# Altium PCB CanSat Communitcation.PcbDoc
Units mil, origin at the board's own origin, x right, y up, seen from the top; angles counter-clockwise.
Board outline 1968.5 x 1968.5 mil, 4 copper layers (Top Layer, Ground, Power, Bottom Layer), stack 64.6 mil thick; 33 components, 45 nets, 221 pads, 64 vias.
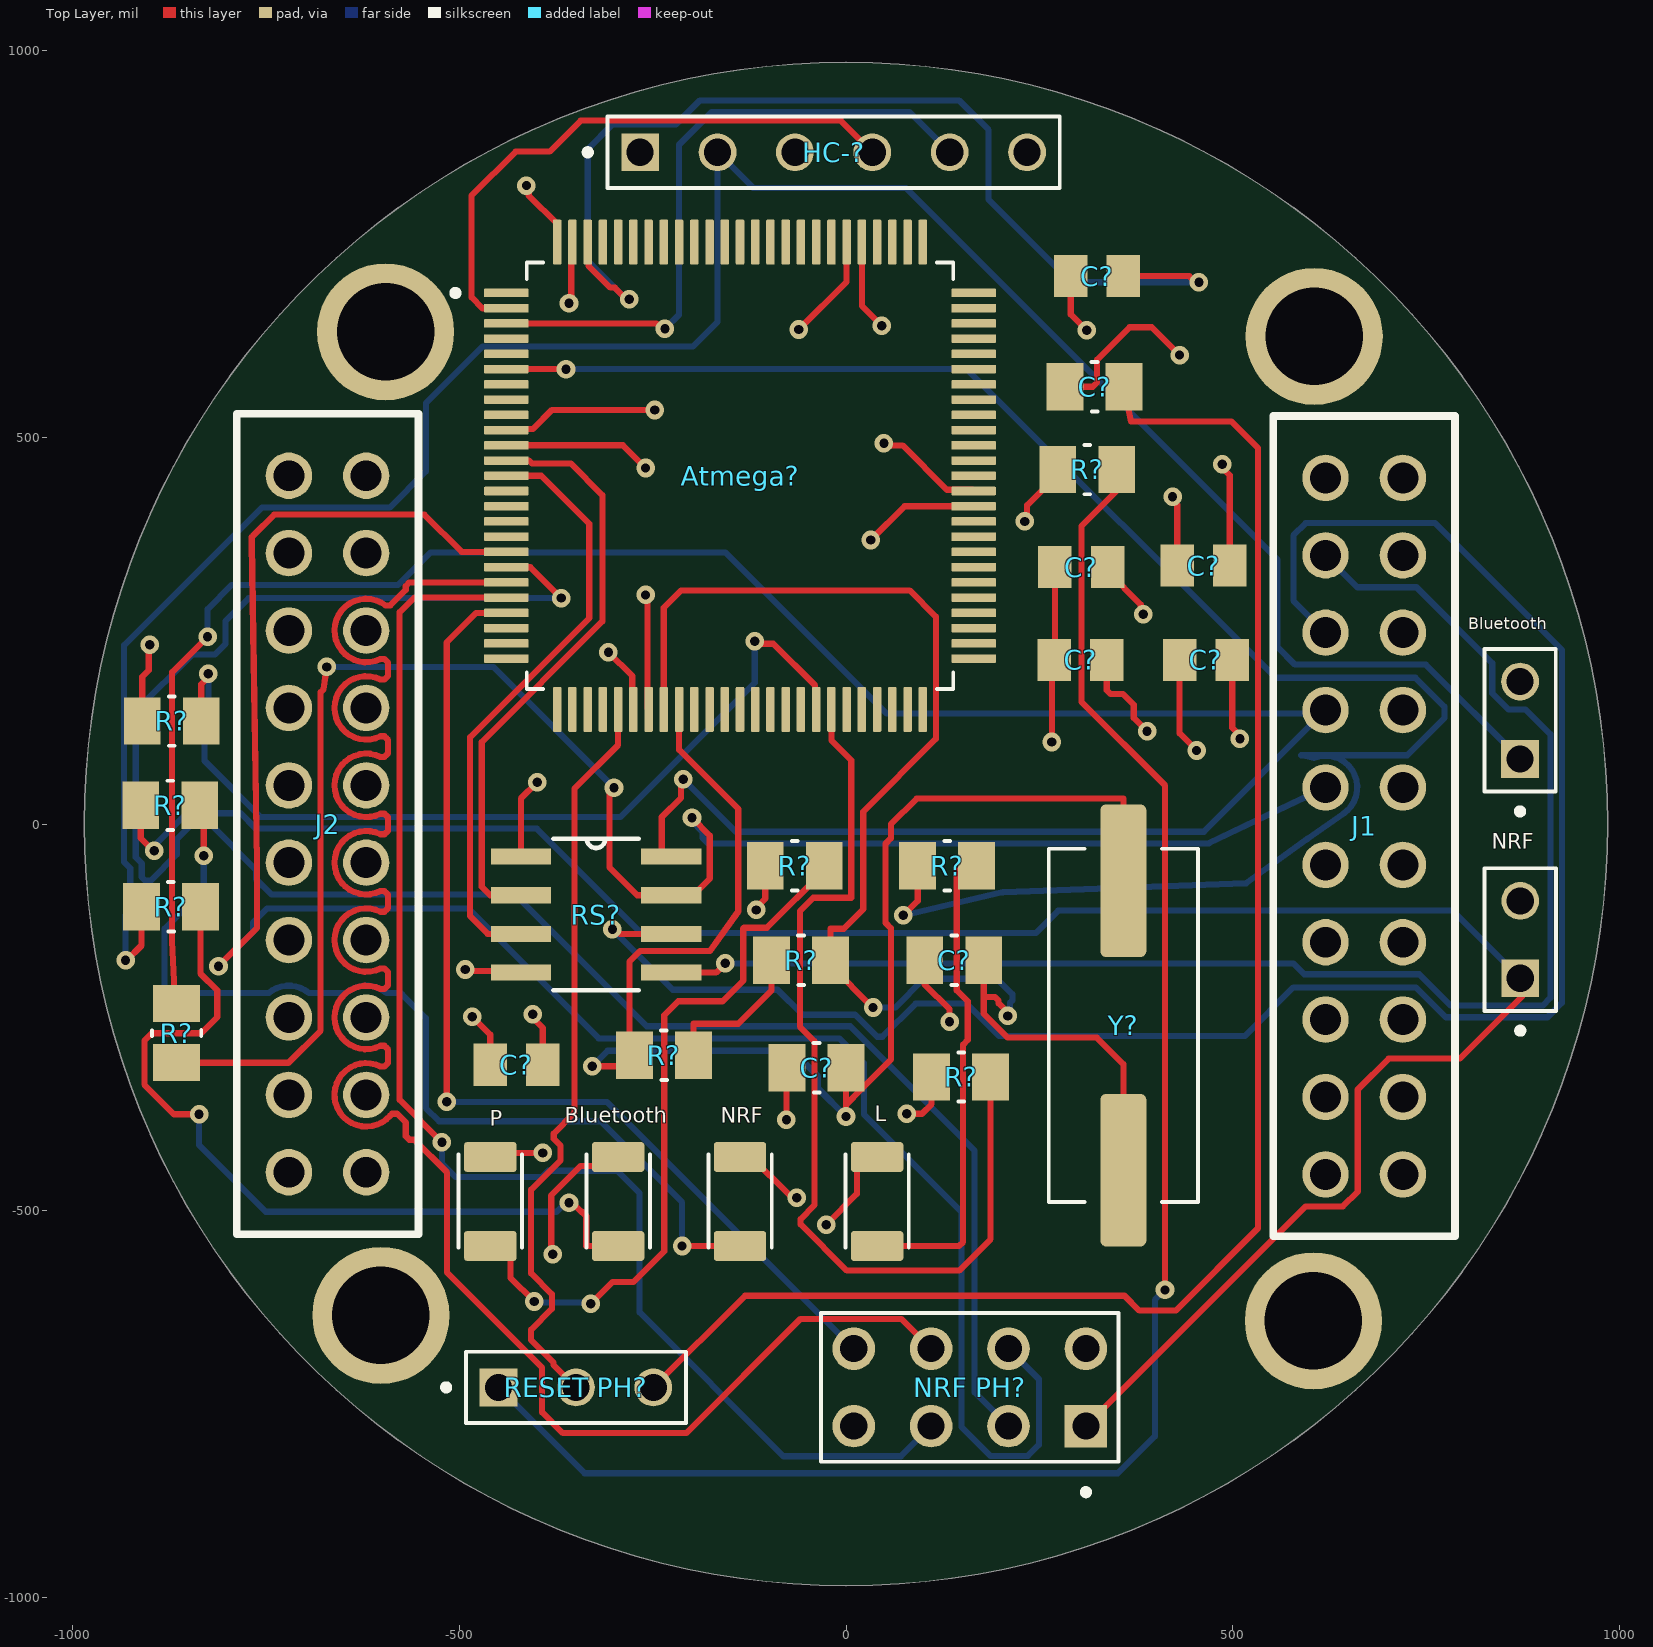
[diagram p0: Top Layer view]
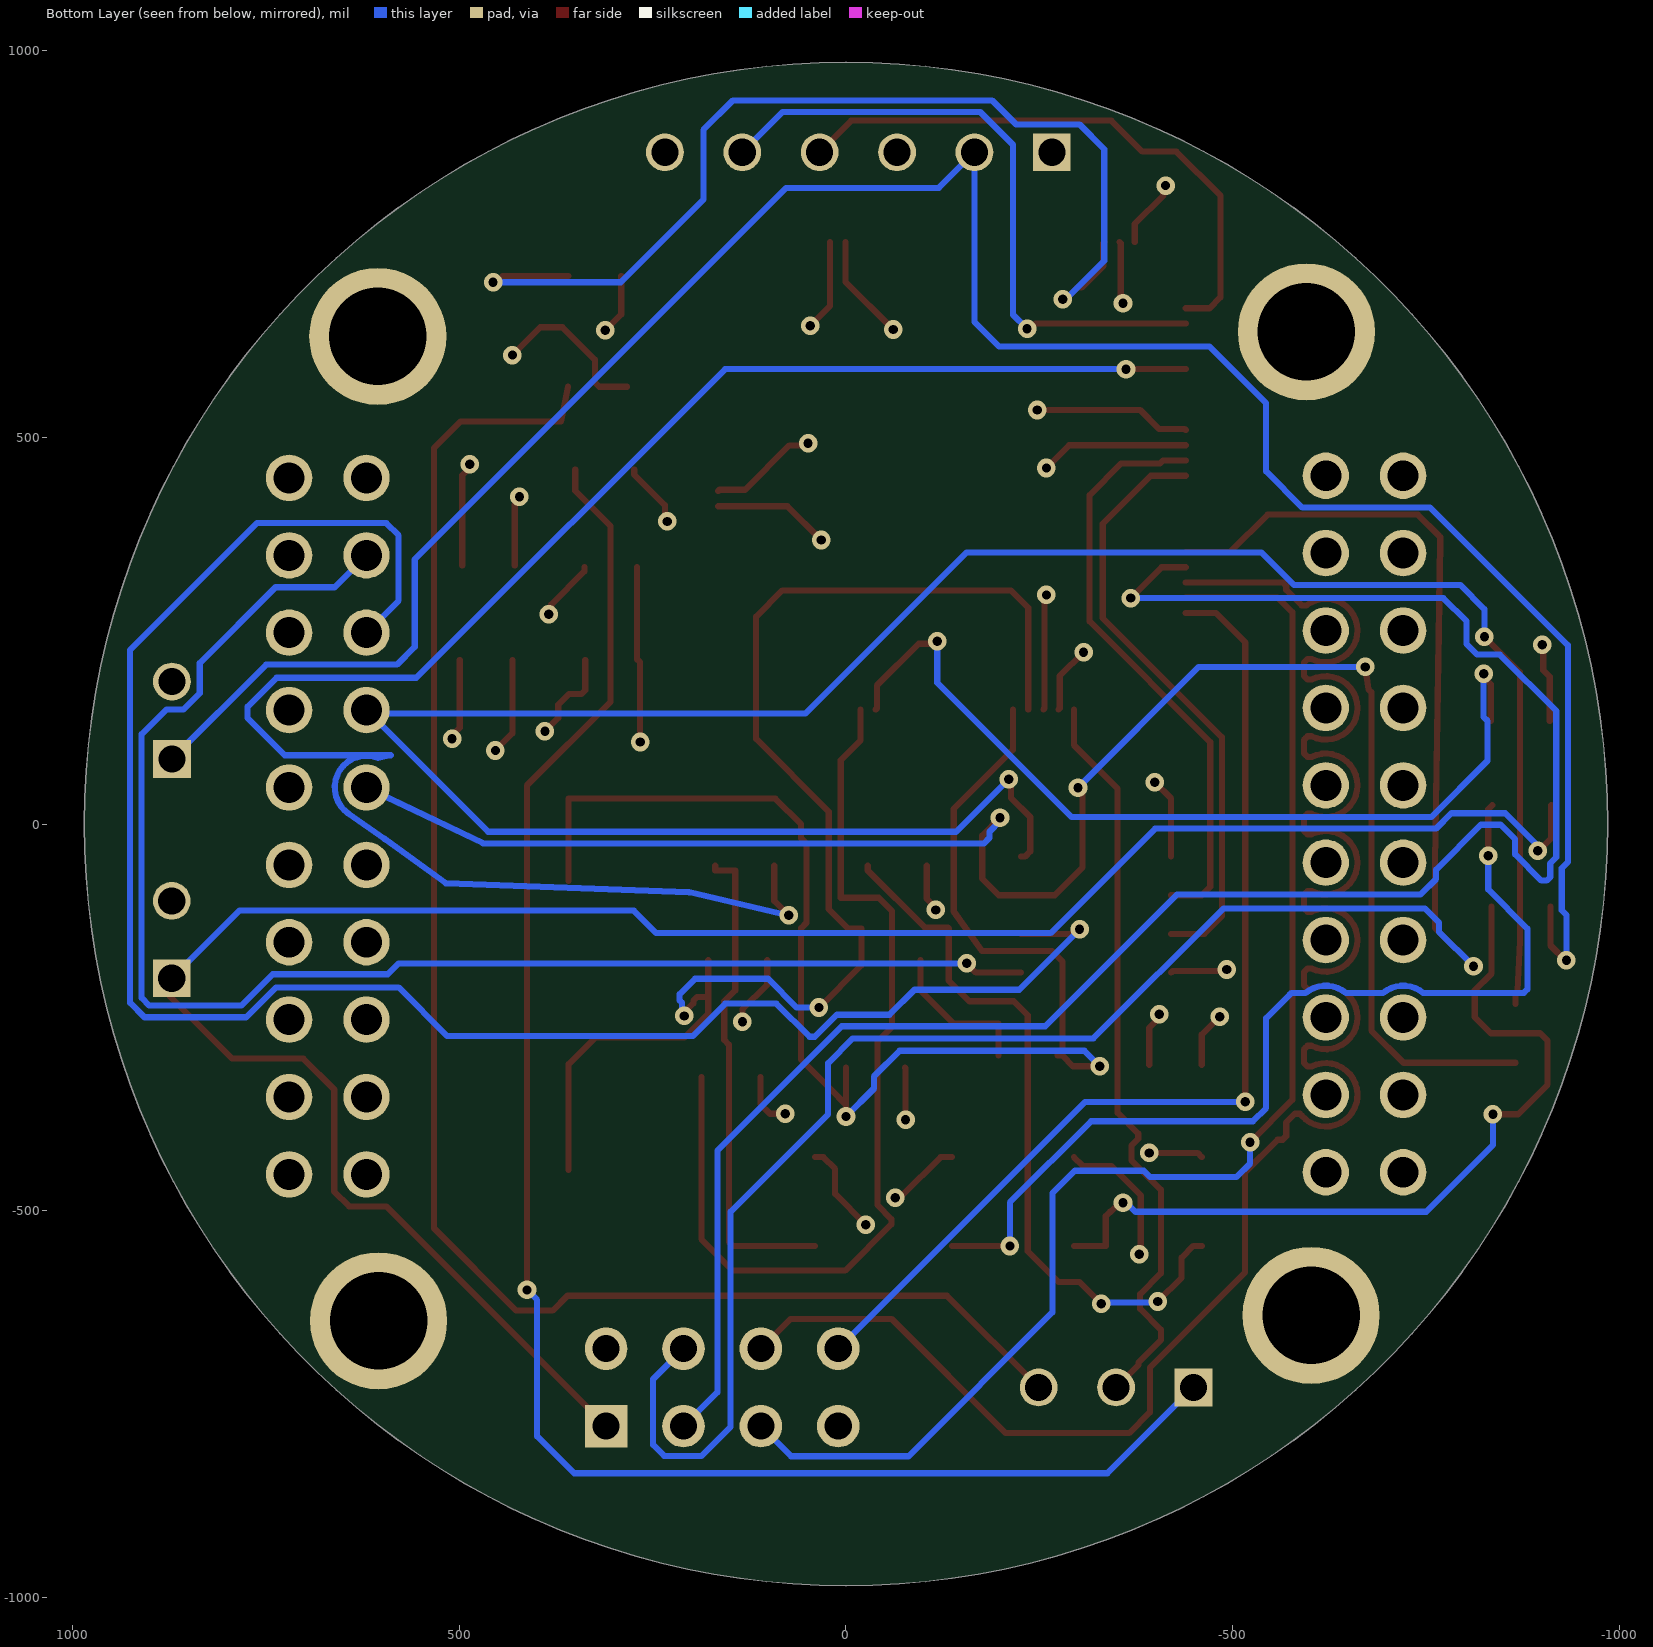
[diagram p1: Bottom Layer view, seen from below]
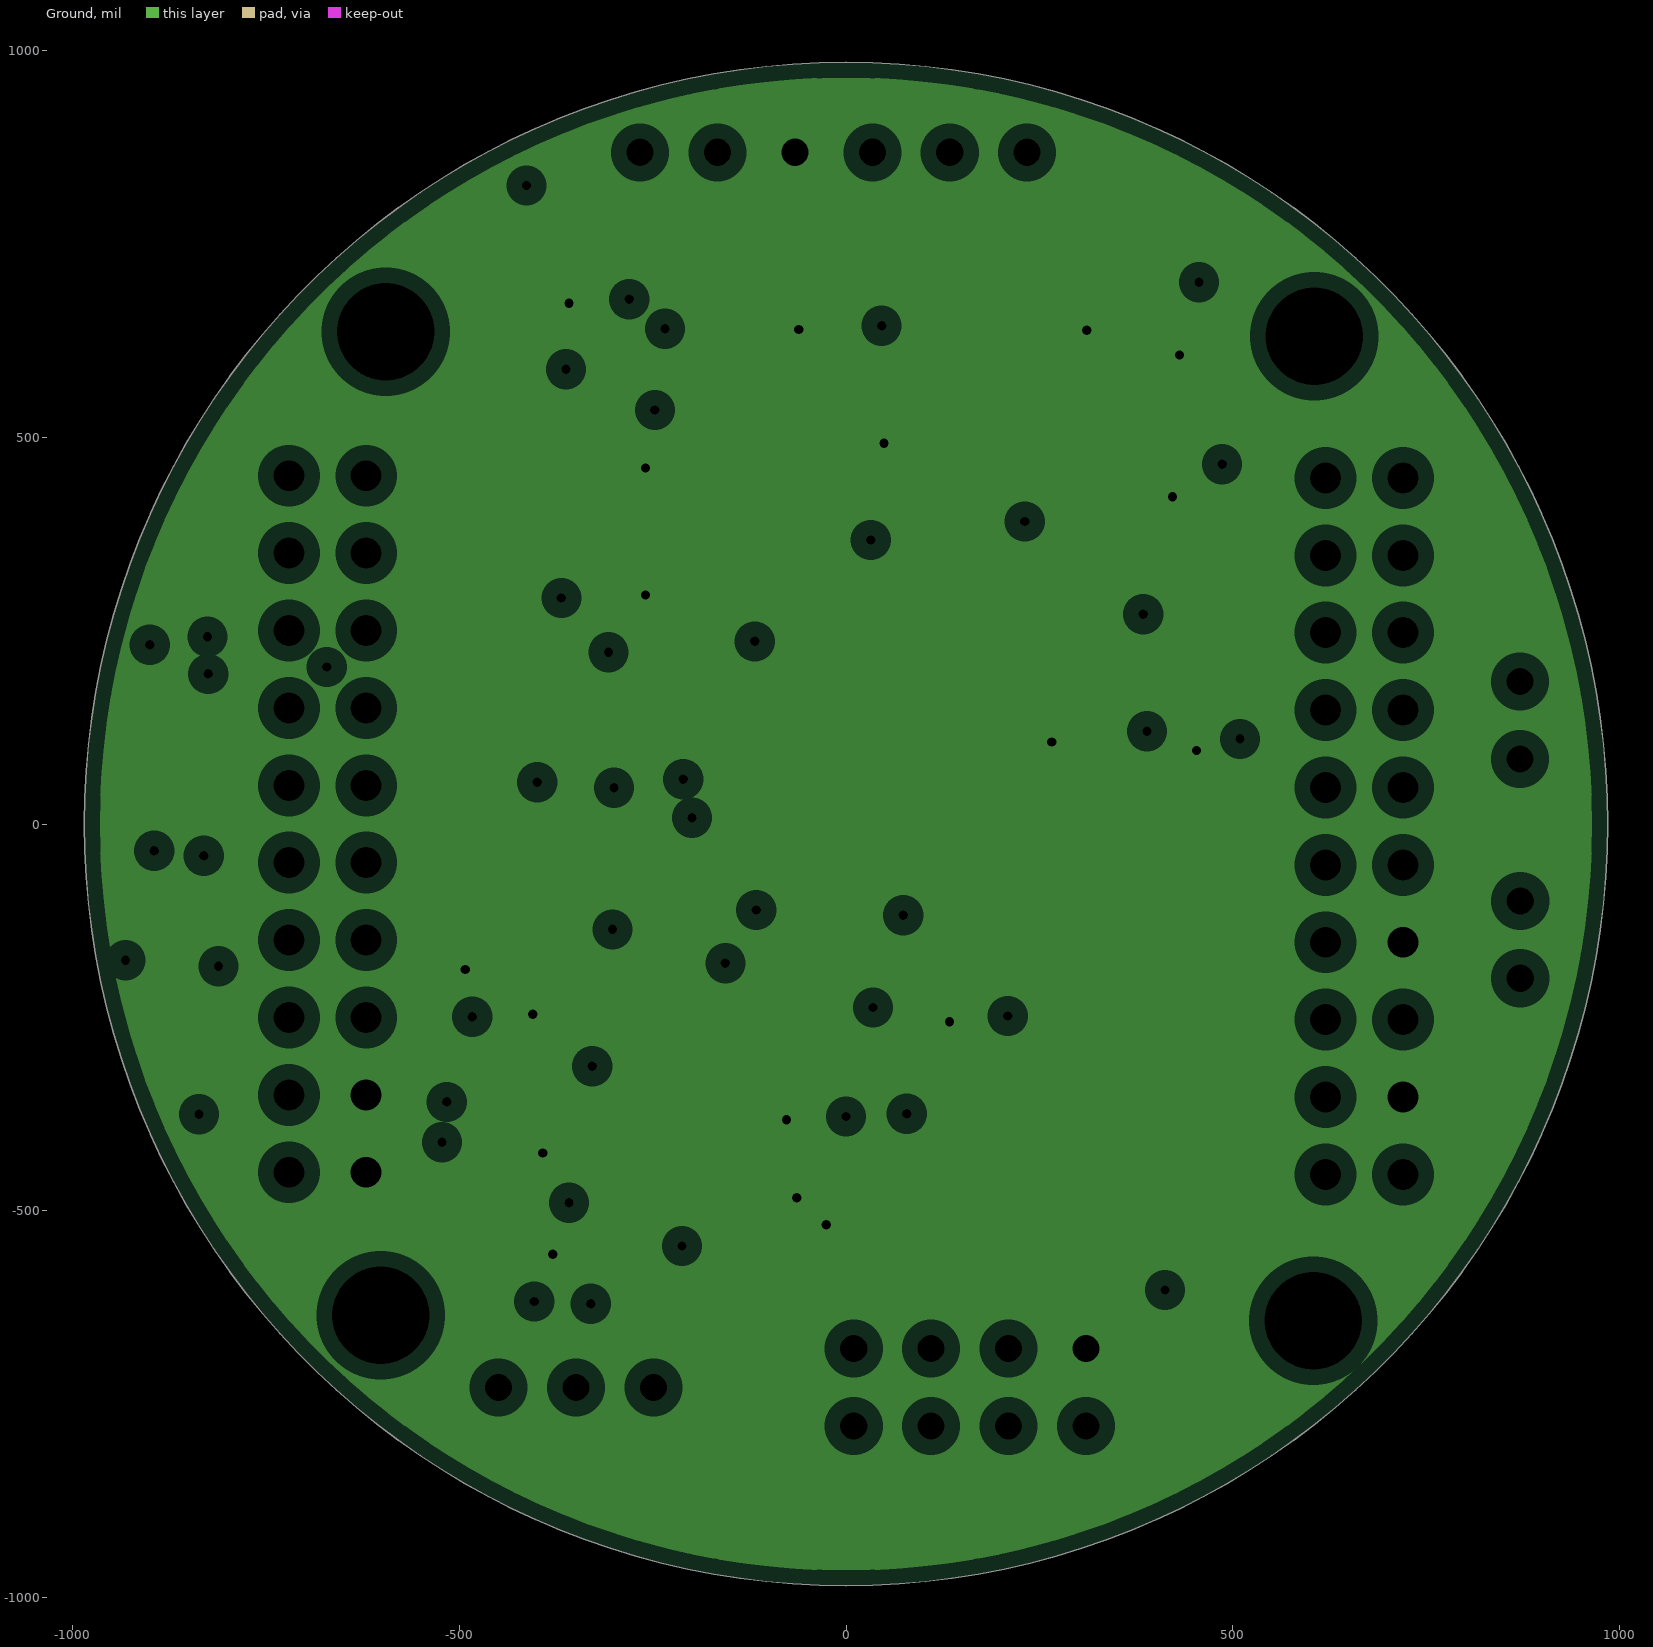
[diagram p2: Ground, clearances drawn from the general rule]
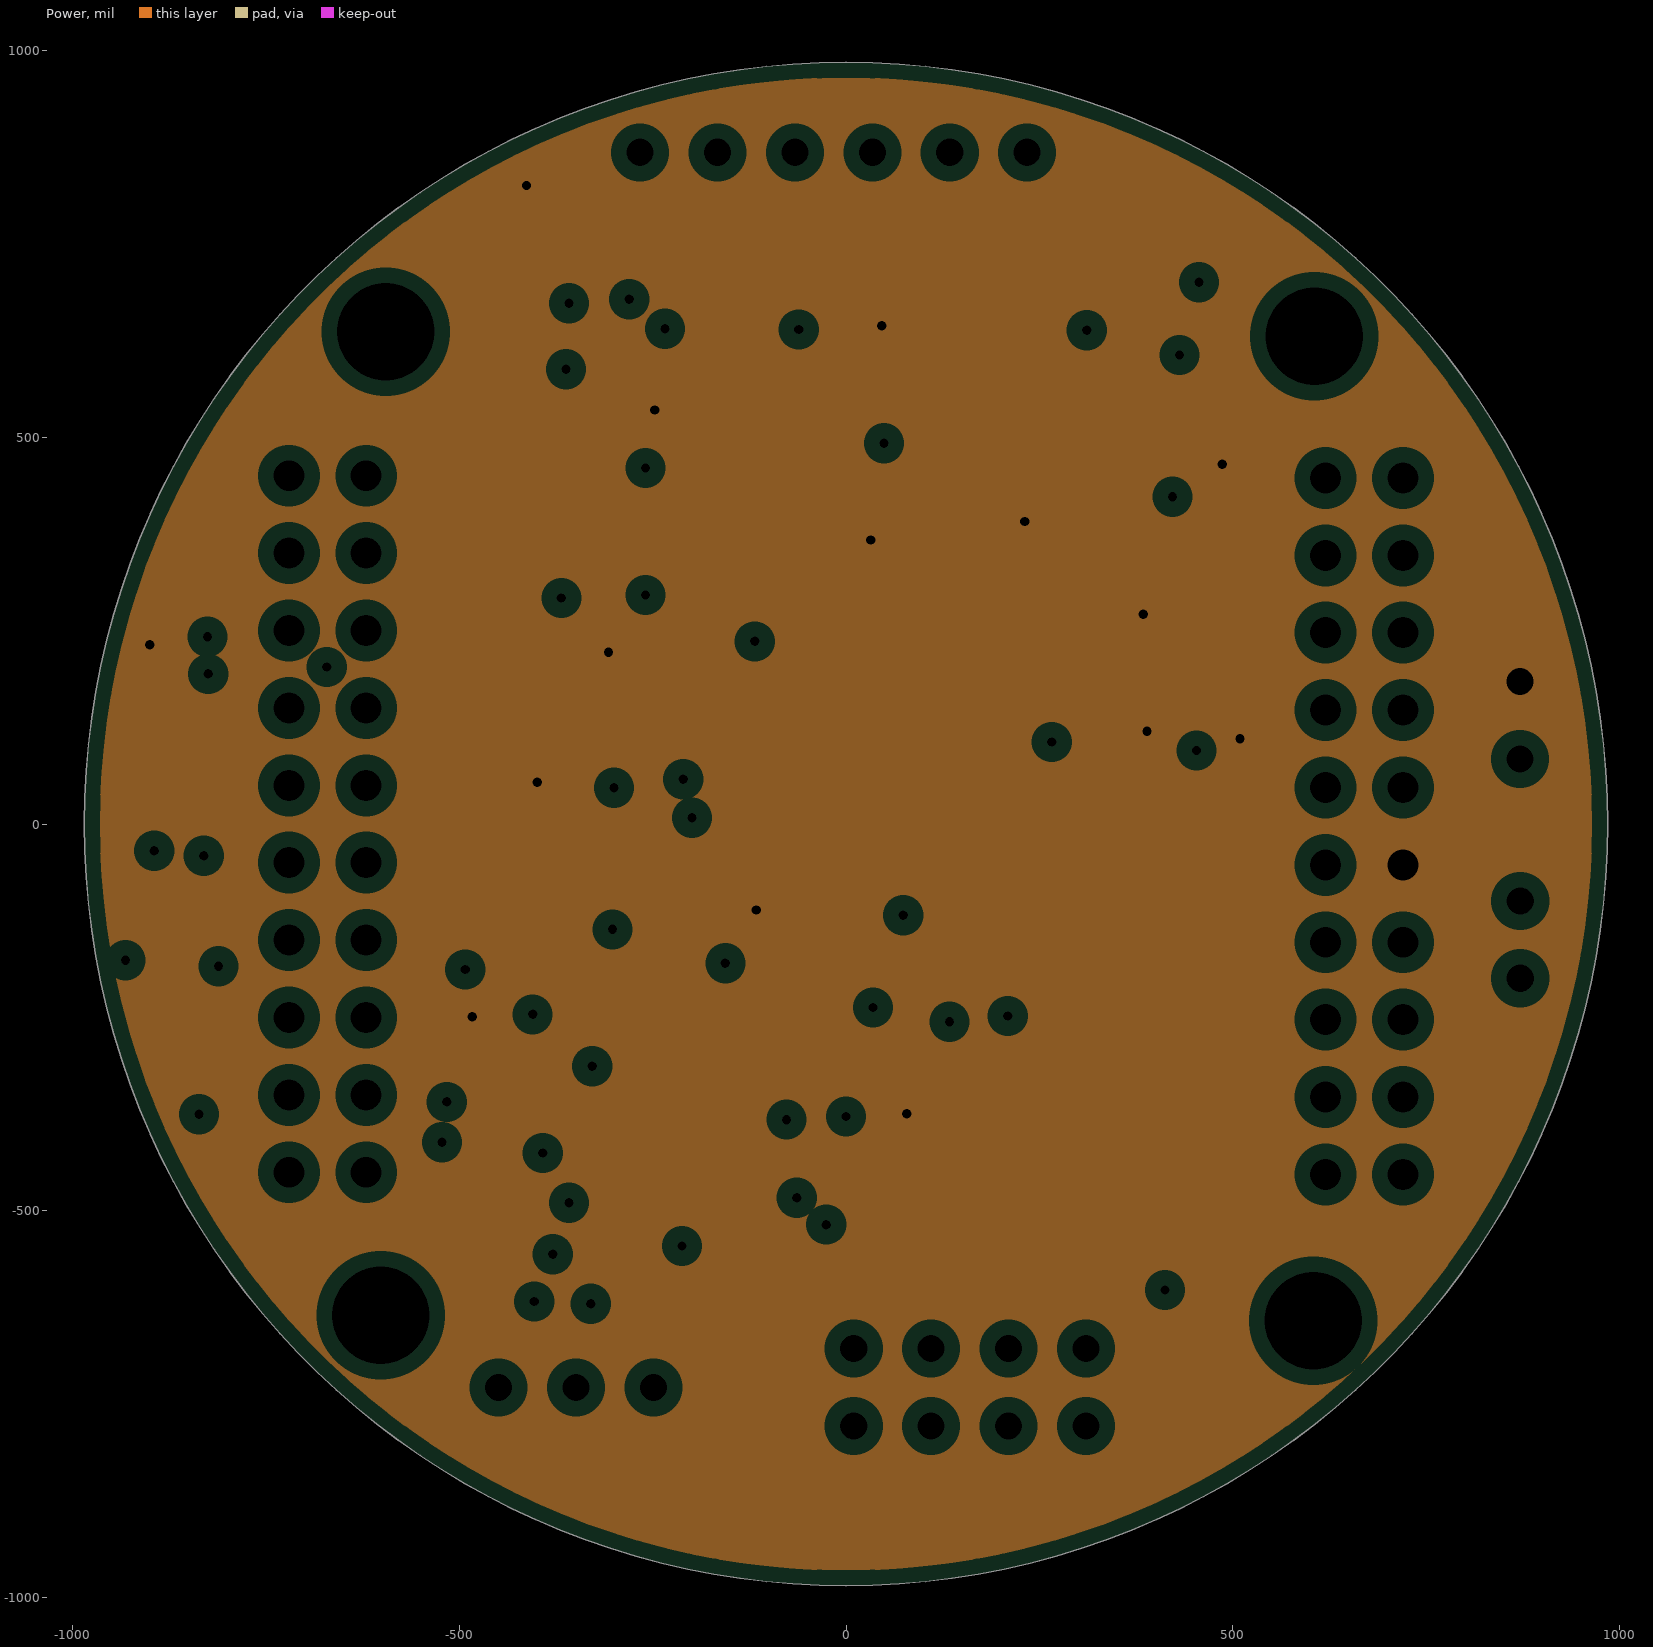
[diagram p3: Power, clearances drawn from the general rule]
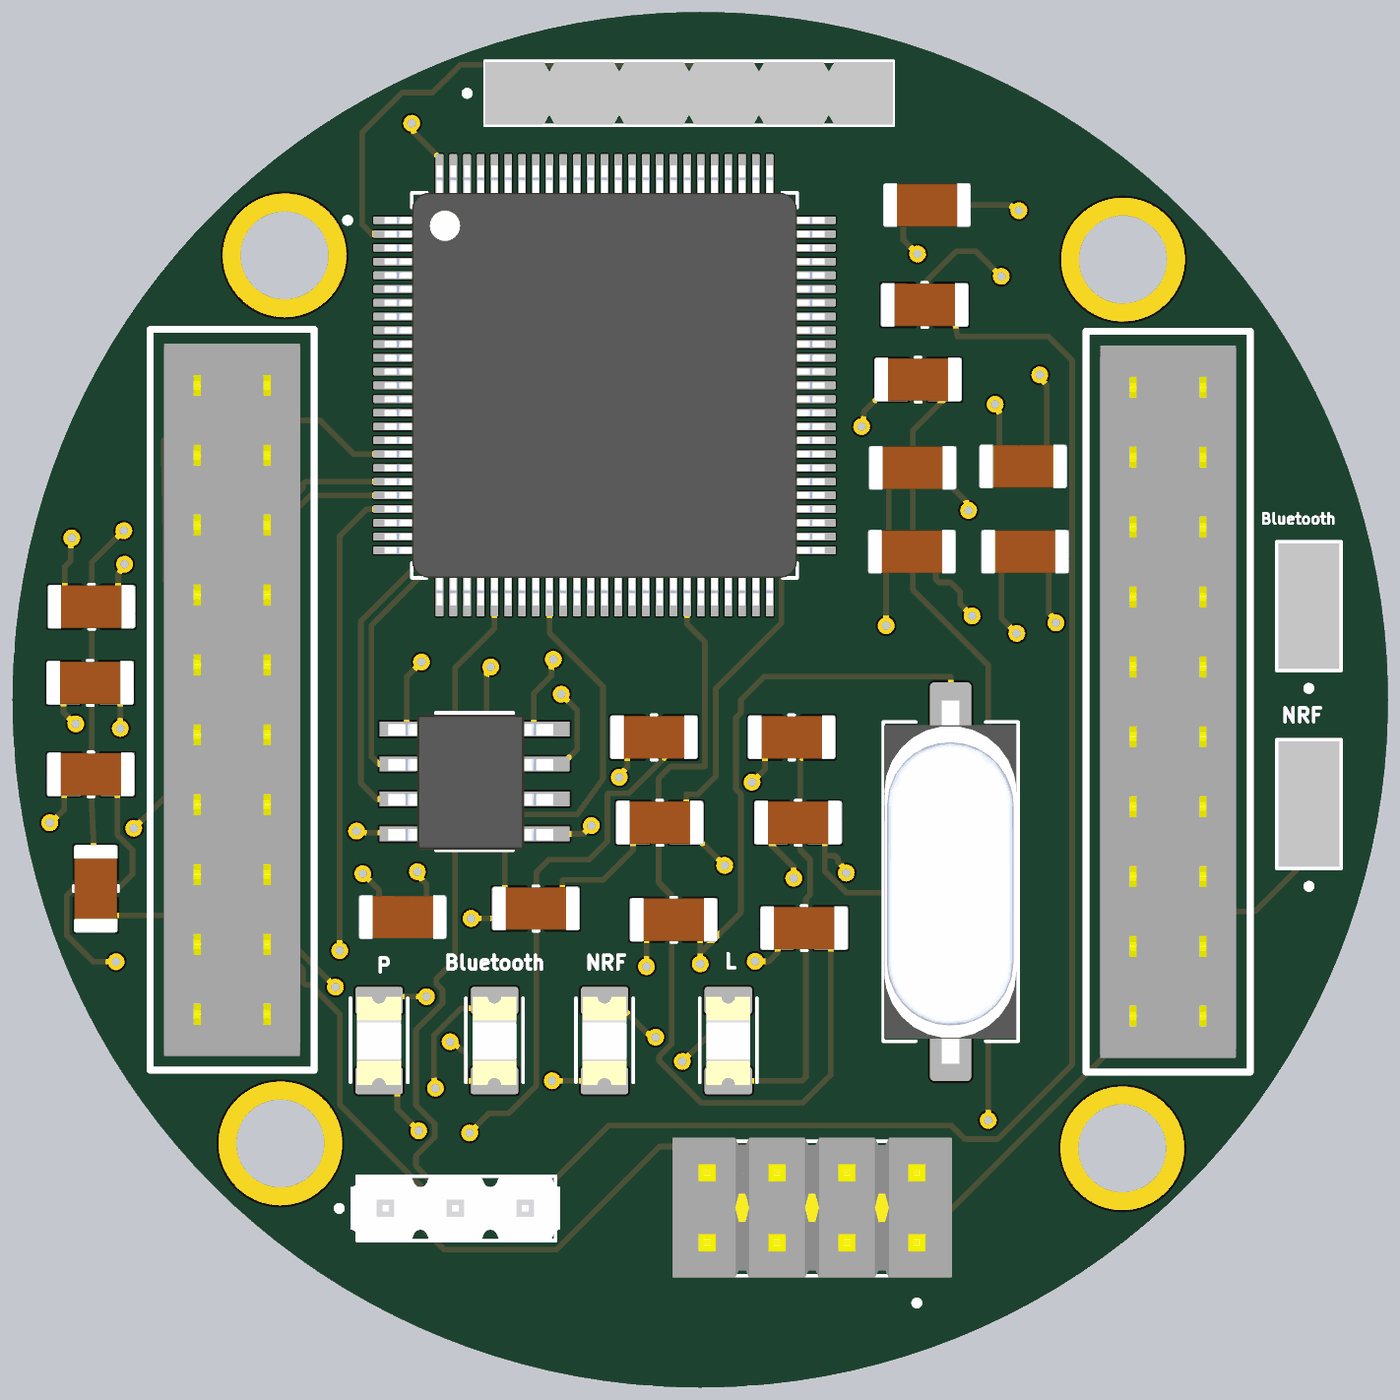
[diagram p4: 3D render of the assembled board from above, using the file's embedded part models]

## Layer stack, top to bottom
Top Solder: solder mask 0.4, Solder Resist, Dk 3.5
Top Layer: signal copper 1.4
Dielectric 1: prepreg 6.7, FR-4, Dk 4.35
Ground: plane copper 0.7, net G
Dielectric 3: core 47, FR-4, Dk 4.35
Power: plane copper 0.7, net VCC-5V(COMM)
Dielectric 2: prepreg 6.7, FR-4, Dk 4.35
Bottom Layer: signal copper 1.4
Bottom Solder: solder mask 0.4, Solder Resist, Dk 3.5

## Board outline
-0.03,-984.24 cw(c-0.03,0) -984.28,0 cw(c-0.03,0) -0.03,984.25 cw(c-0.03,0) 984.22,0 cw(c-0.03,0)

## Design rules (kind name [scope] priority, off if disabled: settings)
Clearance [All] p1: gap=7 ignorepadtopadclearanceinfootprint=FALSE except(0: Arc-Hole Track-Hole SMDPad-Hole THPad-Hole Via-Hole Fill-Hole Poly-Hole Region-Hole Text-Hole)
ComponentClearance [All] p1: gap=30 collisioncheckmode=3 verticalgap=30 showdistances=FALSE
DiffPairsRouting [All] p1: maxlimit=10 minlimit=10 mostfreqgap=10 toplayer_minwidth=15 toplayer_maxwidth=15 toplayer_prefwidth=15 bottomlayer_minwidth=15 bottomlayer_maxwidth=15 bottomlayer_prefwidth=15 substack1={0761D619-B0FF-4D42-81BD-1B94FE1A46B2} toplayer_{0761d619-b0ff-4d42-81bd-1b94fe1a46b2}_minwidth=15 toplayer_{0761d619-b0ff-4d42-81bd-1b94fe1a46b2}_maxwidth=15 toplayer_{0761d619-b0ff-4d42-81bd-1b94fe1a46b2}_prefwidth=15 bottomlayer_{0761d619-b0ff-4d42-81bd-1b94fe1a46b2}_minwidth=15 bottomlayer_{0761d619-b0ff-4d42-81bd-1b94fe1a46b2}_maxwidth=15 bottomlayer_{0761d619-b0ff-4d42-81bd-1b94fe1a46b2}_prefwidth=15 maxuncoupledlength=500
HoleSize [All] p1: absolutevalues=TRUE maxlimit=130 minlimit=1 maxpercent=80.000 minpercent=20.000
HoleToHoleClearance [All] p1: gap=6 allowstackedmicrovias=TRUE
MinimumSolderMaskSliver [All] p1: minsoldermaskwidth=3
PlaneClearance [All] p1: clearance=20
PlaneConnect [All] p1: planeconnectstyle=Relief reliefexpansion=20 reliefentries=4 reliefconductorwidth=10 reliefairgap=10
PolygonConnect [All] p1: connectstyle=Relief reliefconductorwidth=10 reliefentries=4 polygonreliefangle="90 Angle" airgapwidth=10
RoutingVias [All] p1: holewidth=12 width=24 viastyle="Through Hole" minholewidth=10 minwidth=10 maxholewidth=12 maxwidth=24
SilkToSilkClearance [All] p1: silktosilkclearance=4
SilkToSolderMaskClearance [IsPad] p1: minsilkscreentomaskgap=4 clearancetoexposedcopper=TRUE
SolderMaskExpansion [All] p1: expansion=3 istentingtop=FALSE
Width [All] p1: maxlimit=40 minlimit=7 preferedwidth=8 substack1={0761D619-B0FF-4D42-81BD-1B94FE1A46B2} toplayer_{0761d619-b0ff-4d42-81bd-1b94fe1a46b2}_prefwidth=12 bottomlayer_{0761d619-b0ff-4d42-81bd-1b94fe1a46b2}_prefwidth=12 minimp=50.000000 maximp=50.000000 favimp=50.000000
21 further rules are at their usual default settings.

## Classes and differential pairs
component class "CanSat Communication": Atmega? C? HC-? J1 J2 L NRF "NRF PH?" P R? "RESET PH?" RS? Y?

## Components (designator, comment, footprint, x,y, rotation, side; value= is the part's Value field where it differs from the comment)
Atmega? "" QFP50P1600X1600X120-100N -137,450 r0 top
Bluetooth "2 Position PinHeader" TE_2-103327-2 871.71,132.29 r90 top (schematic designator "Bluetooth POWER?")
Bluetooth "(1206) GREEN" RESC3015X65-01 -294.62,-487.07 r90 top (schematic designator "Bluetooth  LED?")
C? "(0805) 100nF" CAPC2012X95N-0 462,334 r0 top
C? "(0805) 100nF" CAPC2012X95N-0 303,212 r0 top
C? "(1206) 22pF" CAPC3216X125N0 -38.82,-313.07 r0 top
C? "(0805) 100nF" CAPC2012X95N-0 -425.82,-311.07 r0 top
C? "(1206) 22pF" CAPC3216X125N0 320.41,566.87 r0 top
C? "(0805) 100nF" CAPC2012X95N-0 324.45,708 r0 top
C? "(1206) 22pF" CAPC3216X125N0 139.18,-174.07 r0 top
C? "(0805) 100nF" CAPC2012X95N-0 304,332 r0 top
C? "(0805) 100nF" CAPC2012X95N-0 465,212 r0 top
HC-? "6 Position PinHeader 1Row" TE_6-146285-6 -266,868 r0 top
J1 "20 Position Elevated Socket Connector" ESQ-110-XX-X-D 669.61,-2.79 r90 top locked
J2 "20 Position Elevated Socket Connector" ESQ-110-XX-X-D -670,0 r90 top locked
L "(1206) Yellow" RESC3015X65-01 40.03,-487.07 r90 top (schematic designator LED?)
NRF "(1206) YELLOW" RESC3015X65-01 -137.14,-487.07 r90 top (schematic designator "NRF LED?")
NRF "2 Position PinHeader" TE_2-103327-2 872,-151 r90 top (schematic designator "NRE POWER?")
"NRF PH?" "8 Position PinHeader 2Row" TE_8-146256-8 160,-728 r180 top
P "BLUE-LED" RESC3015X65-01 -459.82,-487.07 r90 top (schematic designator ?)
R? "(1206) 150" CAPC3216X125N0 -873,-105 r0 top
R? "(1206) 10K" CAPC3216X125N0 311,460 r0 top
R? "(1206) 510K" CAPC3216X125N0 -236,-297 r0 top
R? "(1206)" CAPC3216X125N0 148,-325 r0 top
R? "(1206) 150" CAPC3216X125N0 130,-52 r0 top
R? "(1206) 120" CAPC3216X125N0 -867,-271 r90 top
R? "(1206) 150" CAPC3216X125N0 -67,-52 r0 top
R? "(1206) 510K" CAPC3216X125N0 -58.82,-174.07 r0 top
R? "(1206)" CAPC3216X125N0 -872,135 r0 top
R? "(1206) 65" CAPC3216X125N0 -874,26 r0 top
"RESET PH?" "3 Position PinHeader 1Row" TE_3-103327-3 -449,-728 r0 top
RS? "MAX488ESA+" SOIC127P600X175-8N0 -323,-117 r0 top
Y? "16MHZ" XTAL1140X490X430N-0 360,-260 r90 top

## Footprints (in the part's own frame and the unit in brackets; to place one, negate y for a bottom-side part, rotate by r counter-clockwise, add the part's x,y. Pads: shape width x height; smd on the part's side, far side on the other; paste and mask are expansions set on the pad)
CAPC2012X95N-0 [mm]
  rect 1.1x1.38 smd: 1(-0.863,0) 2(0.863,0)
  body extent -1.6,-0.8 1.6,0.8, height 1.2
CAPC3216X125N0 [mm]
  rect 1.21x1.55 smd: 1(-0.95,-0.047) 2(0.987,-0.047)
  silkscreen extent -0.08,-0.86 0.12,0.76, body extent -1.58,-0.84 1.62,0.76, height 1.25
ESQ-110-XX-X-D [mil]
  round 60 hole 40: 1(-450,50) 2(-450,-50) 3(-350,50) 4(-350,-50) 5(-250,50) 6(-250,-50) 7(-150,50) 8(-150,-50) 9(-50,50) 10(-50,-50) 11(50,50) 12(50,-50) 13(150,50) 14(150,-50) 15(250,50) 16(250,-50) 17(350,50) 18(350,-50) 19(450,50) 20(450,-50)
  silkscreen extent -530,-117 530,117, body extent -510,-100 510,100, height 329
QFP50P1600X1600X120-100N [mm]
  rrect25% 1.47x0.28 smd mask+0.05: 1(-7.67,6) 2(-7.67,5.5) 3(-7.67,5) 4(-7.67,4.5) 5(-7.67,4) 6(-7.67,3.5) 7(-7.67,3) 8(-7.67,2.5) 9(-7.67,2) 10(-7.67,1.5) 11(-7.67,1) 12(-7.67,0.5) 13(-7.67,0) 14(-7.67,-0.5) 15(-7.67,-1) 16(-7.67,-1.5) 17(-7.67,-2) 18(-7.67,-2.5) 19(-7.67,-3) 20(-7.67,-3.5) 21(-7.67,-4) 22(-7.67,-4.5) 23(-7.67,-5) 24(-7.67,-5.5) 25(-7.67,-6) 51(7.67,-6) 52(7.67,-5.5) 53(7.67,-5) 54(7.67,-4.5) 55(7.67,-4) 56(7.67,-3.5) 57(7.67,-3) 58(7.67,-2.5) 59(7.67,-2) 60(7.67,-1.5) 61(7.67,-1) 62(7.67,-0.5) 63(7.67,0) 64(7.67,0.5) 65(7.67,1) 66(7.67,1.5) 67(7.67,2) 68(7.67,2.5) 69(7.67,3) 70(7.67,3.5) 71(7.67,4) 72(7.67,4.5) 73(7.67,5) 74(7.67,5.5) 75(7.67,6)
  rrect25% 0.28x1.47 smd mask+0.05: 26(-6,-7.67) 27(-5.5,-7.67) 28(-5,-7.67) 29(-4.5,-7.67) 30(-4,-7.67) 31(-3.5,-7.67) 32(-3,-7.67) 33(-2.5,-7.67) 34(-2,-7.67) 35(-1.5,-7.67) 36(-1,-7.67) 37(-0.5,-7.67) 38(0,-7.67) 39(0.5,-7.67) 40(1,-7.67) 41(1.5,-7.67) 42(2,-7.67) 43(2.5,-7.67) 44(3,-7.67) 45(3.5,-7.67) 46(4,-7.67) 47(4.5,-7.67) 48(5,-7.67) 49(5.5,-7.67) 50(6,-7.67) 76(6,7.67) 77(5.5,7.67) 78(5,7.67) 79(4.5,7.67) 80(4,7.67) 81(3.5,7.67) 82(3,7.67) 83(2.5,7.67) 84(2,7.67) 85(1.5,7.67) 86(1,7.67) 87(0.5,7.67) 88(0,7.67) 89(-0.5,7.67) 90(-1,7.67) 91(-1.5,7.67) 92(-2,7.67) 93(-2.5,7.67) 94(-3,7.67) 95(-3.5,7.67) 96(-4,7.67) 97(-4.5,7.67) 98(-5,7.67) 99(-5.5,7.67) 100(-6,7.67)
  silkscreen extent -9.44,-7 7,7, body extent -8,-8 8,8, height 1.12
RESC3015X65-01 [mm]
  rrect20% 0.98x1.72 smd: 1(-1.479,-0.004) 2(1.441,-0.004)
  silkscreen extent -1.54,-1.04 1.52,1.04, body extent -1.63,-0.8 1.57,0.8, height 1.1
SOIC127P600X175-8N0 [mil]
  rect 78x21 smd: 1(-97,75) 2(-97,25) 3(-97,-25) 4(-97,-75) 5(97,-75) 6(97,-25) 7(97,25) 8(97,75)
  silkscreen extent -55,-98 55,98, body extent -124,-97 113,95, height 67
TE_2-103327-2 [mm]
  rect 1.24x1.24 hole 0.89: 1(-1.227,0.018)
  round 1.24 hole 0.89: 2(1.313,0.018)
  silkscreen extent -3.05,-1.15 2.38,1.19, body extent -2.32,-1.11 2.36,1.22, height 5.84
TE_3-103327-3 [mm]
  rect 1.24x1.24 hole 0.89: 1(0,0)
  round 1.24 hole 0.89: 2(2.54,0) 3(5.08,0)
  silkscreen extent -1.82,-1.17 6.15,1.17, body extent -1.31,-1.2 6.31,1.21, height 8.18
TE_6-146285-6 [mm]
  rect 1.24x1.24 hole 0.89: 1(0,0)
  round 1.24 hole 0.89: 2(2.54,0) 3(5.08,0) 4(7.62,0) 5(10.16,0) 6(12.7,0)
  silkscreen extent -1.82,-1.17 13.77,1.17, body extent -1.07,-1.14 13.77,1.14, height 8.1
TE_8-146256-8 [mil]
  rect 55.04x55.04 hole 35.04: 1(-150,50)
  round 55.04 hole 35.04: 2(-50,50) 3(50,50) 4(150,50) 5(-150,-50) 6(-50,-50) 7(50,-50) 8(150,-50)
  silkscreen extent -192,-96 192,139, body extent -200,-101 200,99, height 330
XTAL1140X490X430N-0 [mm]
  rrect25% 5.01x1.51 smd: 1(-4.757,0.04) 2(4.743,0.04)
  silkscreen extent -5.81,-2.41 5.79,2.49, body extent -6.62,-2.35 6.58,2.45, height 4.3

## Part data
Atmega?: library part ATMEGA2560-16AU, Package=None, Availability=Unavailable, MP=ATMEGA2560-16AU, Price=None
Bluetooth NRF: "Cabezal del conector Agujero pasante 2 posiciones 0,100 (2,54 mm)", Package=None, Availability=Warning, Check_prices=https://www.snapeda.com/parts/4-103327-4/TE%20Connectivity%20AMP%20Connectors/view-part/2403998/?ref=eda, EU_RoHS_Compliance=Compliant, MF="TE Connectivity", MP=4-103327-4, Price=None, Purchase-URL=https://pricing.snapeda.com/search/part/4-103327-4/?ref=eda, SnapEDA_Link=https://www.snapeda.com/parts/4-103327-4/TE%20Connectivity%20AMP%20Connectors/view-part/2403998/?ref=snap
Bluetooth L NRF P: library part "LED 1206", "LED SMD 1206 High Quality Forward Voltage: 3.2 V / Brightness: 700 mcd", Emitting Color=Amber, Forward Voltage=2V, Manufacturer="Wurth Elektronik", Manufacturer Part Number=150060AS75003, Operating Temperature max.=100C, Operating Temperature min.=-40C, Chip Technology=AlInGaP, ComponentLink1Description="Manufacturer Link", ComponentLink1URL=http://www.we-online.de, ComponentLink2Description=Datasheet, ComponentLink2URL=https://www.we-online.com/catalog/datasheet/150060AS75003.pdf, Dominant Wavelength=605nm, Height=0.7mm, Length=1.6mm, Luminous Intensity=350mcd, Mounting Technology=SMT, Packaging="Tape and Reel", Peak Wavelength=610nm, Size=0603, Viewing Angle=140°, Width=0.8mm
C? C? C? C? C? C?: library part "Capacitor 0805", "UMK212SD103KD-T/CAP CER 10000PF 50V 0805", Package=None, Availability=Unavailable, MP=UMK212SD103KD-T, Price=None
C? C? C?: library part "Capacitor 1206", "UMF316B7103KFHT/1206 Capacitor", Package=None, Availability=Unavailable, MP=UMF316B7103KFHT, Price=None
HC-?: "Connector Header Through Hole 6 position 0.100 (2.54mm)", Package=None, Digi-Key_Part_Number=A122872-ND, DigiKey-Purchase-URL=https://snapeda.com/shop?store=DigiKey&id=2411669, EU_RoHS_Compliance=Compliant, MF="TE Connectivity", MP=5-146285-6, SnapEDA_Link=https://www.snapeda.com/parts/5-146285-6/TE%20Connectivity%20AMP%20Connectors/view-part/2411669/?ref=snap
J1 J2: "20 Position Elevated Socket Connector Through Hole", Package=None, Availability=Unavailable, MF=Samtec, MP=ESQ-110-14-T-D, Price=None, SnapEDA_Link=https://www.snapeda.com/parts/ESQ-110-14-T-D/Samtec%20Inc./view-part/786056/?ref=snap
"NRF PH?": "08 MODII HDR DRST B/A .100CL LF", Package=None, Availability=Unavailable, MF="TE Connectivity", MP=5-146256-4, Price=None, SnapEDA_Link=https://www.snapeda.com/parts/5-146256-4/TE%20Connectivity%20AMP%20Connectors/view-part/500529/?ref=snap
R? R? R? R? R? R? R? R? R? R?: library part "Resistor 1206"
"RESET PH?": "Conn Unshrouded Header HDR 3 POS 2.54mm Solder ST Thru-Hole Carton", Package=None, Availability=Unavailable, EU_RoHS_Compliance=Compliant, MF="TE Connectivity", MP=4-103327-5, Price=None, SnapEDA_Link=https://www.snapeda.com/parts/4-103327-5/TE%20Connectivity%20AMP%20Connectors/view-part/2403997/?ref=snap, TE_purchase_URL=https://www.te.com/usa-en/product-4-103327-5.html?te_bu=Cor&te_type=disp&te_campaign=seda_glo_cor-seda-global-disp-prtnr-fy19-seda-model-bom-cta_sma-317_1&elqCampaignId=32493
RS?: "1/1 Transceiver Full RS422, RS485 8-SOIC", Package="SOIC-8 Maxim", Availability=Unavailable, MF="Maxim Integrated", MP=MAX488ESA+T, Price=None, SnapEDA_Link=https://www.snapeda.com/parts/MAX488ESA+T/Maxim%20Integrated/view-part/48834/?ref=snap
Y?: library part "Crystal 16MHZ"

## Free pads (board coordinates)
  round 177.17 hole 125.98 unplated: 1(605,630) 2(604,-642) 3(-601,-635) 4(-595,636)

## Via types
v1: diameter 24, hole 12, Top Layer to Bottom Layer, 64 vias

## Nets (pads, with @x,y where several pads share a name; then routed paths per layer and width w, separated by ;. In a path a pad name is that pad's centre, name@x,y a point inside that pad or via, vN(x,y) a via of type N, cw(c..) or ccw(c..) an arc to the next point about the centre after c; other vN are vias at no path point)
3.3V: J1.12
5V: J1.2
9V: J1.6
AREF: Atmega?.98 C?.2@358.43,708 | length 1387.2
  Top Layer w8: Atmega?.98 -332.34,750.46 -332.34,720.95 -304.5,693.1 -298.84,693.1 -283.74,678 v1(-280,678) ; C?.2@358.43,708 443.67,708 451.67,700 v1(456,700)
  Bottom Layer w8: v1(-280,678) -284,678 -333.82,727.82 -333.82,871.93 -301.82,903.93 -219.82,903.93 -188.82,934.93 146.18,934.93 184.18,896.93 184.18,806.93 291.11,700 v1(456,700)
CE: "NRF PH?.6" Atmega?.18 | length 2675.6
  Top Layer w8: v1(-810.94,-183.94) -761,-134 -761,-50.8 -761,-50.73 -761,-50.63 -768,364.12 -768,370.74 -765.66,373.09 -738.82,399.93 -544.82,399.93 -496.47,351.58 Atmega?.18
  Bottom Layer w8: v1(-810.94,-183.94) -766.19,-139.19 -766.19,-127.19 -748.27,-109.26 -740.55,-109.26 -740.29,-109 -487.89,-109 -319.82,-277.07 -8.82,-277.07 23.18,-309.07 23.18,-375.07 149.18,-501.07 149.18,-779.07 186.63,-816.52 234.74,-816.52 249.18,-802.07 249.18,-717.18 210,-678
CSN: "NRF PH?.2" Atmega?.19 | length 2608.1
  Top Layer w8: Atmega?.19 -407.78,331.89 v1(-367.82,291.93)
  Bottom Layer w8: v1(-367.82,291.93) -772.07,291.93 -802,262 -802,232.47 -815.47,219 -845,219 -917.82,146.18 -917.82,-43.07 -910,-50.89 -910,-68.51 -905.31,-73.19 -898.69,-73.19 -864.57,-39.07 -864.57,-19.82 -845.82,-1.07 -820.52,-1.07 -762.52,-59.07 -762.52,-71.07 -742.52,-91.07 -427.82,-91.07 -257.44,-261.46 5.56,-261.46 166.18,-422.07 166.18,-734.18 210,-778
G: "NRF PH?.5" Atmega?.11 Atmega?.32 Atmega?.62 Atmega?.81 Atmega?.99 Bluetooth.2@-294.48,-430.33 C?.1@101.77,-175.94 C?.1@269.02,212 C?.1@270.02,332 C?.1@283,565 C?.1@290.48,708 C?.1@428.02,334 C?.1@431.02,212 C?.1@-76.23,-314.94 C?.2@-391.84,-311.07 HC-?.3 J1.4 J1.8 J2.2 J2.4 L.2 NRF.2@-137,-430.33 P.2 RS?.4 | length 2212.7
  Top Layer w8: v1(-492,-188) -490,-190 -422,-190 RS?.4 ; P.2 -454.35,-425 v1(-391.82,-425) ; Atmega?.11 -288.37,489.37 v1(-259,460) ; v1(-405,-246) -405,-250.33 -391.84,-263.49 C?.2@-391.84,-311.07 ; v1(-379,-556) -381,-554 -381,-479.94 -342.82,-441.76 -305.91,-441.76 Bluetooth.2@-294.48,-430.33 ; v1(-358,673) -355.05,675.95 -355.05,750.46 Atmega?.99 ; v1(-259,296) -256.62,293.62 -256.62,149.54 Atmega?.32 ; NRF.2@-137,-430.33 -122.43,-430.33 -72.82,-479.94 -66.88,-479.94 v1(-63.82,-483) ; v1(-77,-382) -77,-315.72 C?.1@-76.23,-314.94 ; v1(-61,639) 0.8,700.8 Atmega?.81 ; v1(-25.68,-517.68) 14.17,-477.83 14.17,-445.62 29.46,-430.33 L.2 ; v1(49,492) 51.81,489.19 73,489.19 130.36,431.83 163.46,431.83 Atmega?.62 ; C?.1@101.77,-175.94 101.77,-207.46 133.77,-239.46 v1(133.77,-255.46) ; v1(266,106) 266,208.98 269.02,212 270.02,213 C?.1@270.02,332 ; C?.1@283,565 318.82,565 324.43,570.61 324.43,600.07 366.36,642 395,642 v1(431,606) ; C?.1@290.48,708 290.48,658.52 v1(311,638) ; v1(422,423) 422,418.67 428.02,412.65 C?.1@428.02,334 ; C?.1@431.02,212 431.02,116.98 v1(453,95)
MISO: "NRF PH?.8" Atmega?.22 | length 1344.7
  Top Layer w8: v1(-515.99,-359.07) -515.99,234.66 -477.82,272.84 Atmega?.22
  Bottom Layer w8: v1(-515.99,-359.07) -308.93,-359.07 10,-678
MOSI: "NRF PH?.3" Atmega?.21 | length 1782.5
  Top Layer w8: v1(-522.18,-411.18) -576.82,-356.55 -576.82,273.52 -557.82,292.52 Atmega?.21
  Bottom Layer w8: v1(-522.18,-411.18) -522.18,-438.71 -504.82,-456.07 -392.82,-456.07 -384.82,-448.07 -295.82,-448.07 -266.82,-477.07 -266.82,-631.07 -80.82,-817.07 70.93,-817.07 110,-778
Net?_1: P.1 R?.2@-28.16,-53.87 | length 933.7
  Top Layer w8: P.1 -448.97,-545.29 -433.68,-560.58 -433.68,-586.32 v1(-403,-617) ; v1(-330,-620) -301.91,-591.91 -274.65,-591.91 -234.82,-552.07 -234.82,-247.07 -216.82,-229.07 -159.56,-229.07 -132.89,-202.41 -132.89,-135.15 -131.82,-134.07 -102.16,-134.07 -28.16,-60.07 R?.2@-28.16,-53.87
  Bottom Layer w8: v1(-403,-617) -401.5,-618.5 -331.5,-618.5 v1(-330,-620)
"NetBluetooth  LED?_1": Bluetooth.1@-294.48,-545.29 R?.2@-834.16,-106.87 | length 1069.1
  Top Layer w8: v1(-836,-375) -868.43,-375 -906.64,-336.79 -906.64,-280.04 -896.89,-270.28 -833.37,-270.28 -812.62,-249.53 -812.62,-214.78 -834.16,-193.24 R?.2@-834.16,-106.87 ; v1(-358,-489.47) -353.67,-489.47 -342.12,-501.02 -341.26,-501.02 -335.6,-506.67 -335.6,-545.29 Bluetooth.1@-294.48,-545.29
  Bottom Layer w8: v1(-836,-375) -836,-414.89 -749.82,-501.07 -373.93,-501.07 -362.33,-489.47 v1(-358,-489.47)
"NetBluetooth POWER?_1": Bluetooth.1@871,84 HC-?.2 R?.1@-910.41,-106.87 | length 3129.8
  Top Layer w8: v1(-931,-176) -929.42,-176 -910.41,-156.99 R?.1@-910.41,-106.87
  Bottom Layer w8: v1(-931,-176) -931,-117.39 -925,-111.39 -925,-57.11 -932.82,-49.29 -932.82,230.93 -754.82,408.93 -589.82,408.93 -542.82,455.93 -542.82,543.93 -469.82,616.93 -198,616.93 -166,648.93 HC-?.2 -119.93,821.93 77.18,821.93 557.18,341.93 557.18,228.93 580.18,205.93 749.07,205.93 Bluetooth.1@871,84
NetC?_2: "RESET PH?.3" C?.2@359.25,565 | length 2114.7
  Top Layer w8: -249,-728 -130.48,-609.48 359.87,-609.48 379.08,-628.69 426.19,-628.69 532.18,-522.7 532.18,485.93 498.18,519.93 368.25,519.93 C?.2@359.25,565
NetLED?_1: L.1 R?.2@168.84,-53.87 | length 633.4
  Top Layer w8: L.1 146.18,-545.29 151.18,-540.29 151.18,-285.07 157.18,-279.07 157.18,-229.07 143.18,-215.07 143.18,-60.07 168.84,-60.07 R?.2@168.84,-53.87
"NetNRE POWER?_1": "NRF PH?.1" NRF.1@871.29,-199.29 R?.1@-911.41,24.13 | length 2864.2
  Top Layer w8: R?.1@-911.41,24.13 -911.41,-18.21 -895.08,-34.55 v1(-893.82,-34.55) ; 310,-778 593.93,-494.07 642.18,-494.07 661.18,-475.07 661.18,-343.07 701.18,-303.07 793.18,-303.07 874.29,-221.97 874.29,-202.29 NRF.1@871.29,-199.29
  Bottom Layer w8: v1(-893.82,-34.55) -890.76,-31.49 -890.76,-24.8 -852.03,13.93 -782.37,13.93 -762.45,-6 -399.47,-6 -264.47,-141 245.05,-141 274.26,-111.79 783.79,-111.79 NRF.1@871.29,-199.29
"NetNRF LED?_1": NRF.1@-137,-545.29 R?.2@-835.16,24.13 | length 1251.5
  Top Layer w8: R?.2@-835.16,24.13 -830,18.97 v1(-830,-41) ; v1(-211.82,-545.29) NRF.1@-137,-545.29
  Bottom Layer w8: v1(-830,-41) -830,-84.61 -880.64,-135.25 -880.64,-213.67 -875.96,-218.36 -746.07,-218.36 cw(c-720,-250) -693.93,-218.36 -646.07,-218.36 cw(c-620,-250) -593.93,-218.36 -575.54,-218.36 -573.19,-220.7 -542.82,-251.07 -542.82,-367.07 -525.82,-384.07 -316.82,-384.07 -211.82,-489.07 v1(-211.82,-545.29)
NetR?_1: R?.1@-96.23,-175.94 R?.2@-197.16,-298.87 | length 198.7
  Top Layer w8: R?.2@-197.16,-298.87 -197.16,-258.07 -139.23,-258.07 -96.23,-215.07 R?.1@-96.23,-175.94
NetR?_2: "RESET PH?.1" R?.2@349.84,458.13 | length 2232.3
  Top Layer w8: R?.2@349.84,458.13 349.84,430.59 304.18,384.93 304.18,157.93 412.18,49.93 v1(412.18,-602.07)
  Bottom Layer w8: -449,-728 -337.93,-839.07 351.18,-839.07 399.18,-791.07 399.18,-615.07 v1(412.18,-602.07)
PE3: Atmega?.5
PE4: Atmega?.6 R?.1@92.59,-53.87 | length 2421.8
  Top Layer w8: Atmega?.6 v1(-361.82,587.8) ; v1(74,-118) 92.59,-99.41 R?.1@92.59,-53.87
  Bottom Layer w8: v1(-361.82,587.8) 156.31,587.8 555.18,188.93 735.87,188.93 773.18,151.62 773.18,136.93 725.18,88.93 619.61,88.93 588.18,88.93 604.61,85.37 cw(c619.61,47.21) 643.07,13.59 596.14,-19.17 ccw(c619.61,-52.79) 595.53,-19.6 517.12,-76.49 202.97,-88.07 v1(74,-118)
PE5: Atmega?.7
PF0: Atmega?.97
PF1: Atmega?.96
PF2: Atmega?.95
PG5: Atmega?.1
"RD + (OBC-COMM)": J1.17 RS?.5 | length 1917.8
  Top Layer w8: RS?.5 -167.82,-192 v1(-155.89,-180.07)
  Bottom Layer w8: v1(-155.89,-180.07) 578.18,-180.07 592.18,-194.07 740.73,-194.07 781.35,-234.7 900.25,-234.7 910.18,-224.77 910.18,115.93 878.18,147.93 856.18,147.93 835.18,168.93 835.18,207.93 737.18,305.93 660.89,305.93 J1.17
"RD - (OBC-COMM)": J1.15 RS?.6 | length 2468.1
  Top Layer w8: v1(-301.82,-136.18) -297.49,-136.18 -291.67,-142 RS?.6
  Bottom Layer w8: v1(-301.82,-136.18) -223.93,-214.07 -88.55,-214.07 -56.16,-246.46 11.78,-246.46 40.35,-275.03 46.97,-275.03 89.93,-232.07 156.18,-232.07 198.11,-274 515.26,-274 578.18,-211.07 736.51,-211.07 775.14,-249.7 906.47,-249.7 925.18,-230.99 925.18,224.93 761.18,388.93 594.18,388.93 578.18,372.93 578.18,288.63 J1.15
RESET: "RESET PH?.2" Atmega?.30 | length 976.4
  Top Layer w8: -349,-728 -377.82,-699.18 -377.82,-696.13 -407,-666.95 -407,-653.53 -380,-626.53 -380,-607.47 -407,-580.47 -407,-472.71 -368.82,-434.53 -368.82,-415.47 -377.68,-406.61 -377.68,-399.98 -351,-373.3 -351,45.57 -294.48,102.09 Atmega?.30
Rx: Atmega?.3 HC-?.5 | length 842.1
  Top Layer w8: Atmega?.3 -245.26,646.85 -238.33,639.93 v1(-234,639.93)
  Bottom Layer w8: v1(-234,639.93) -215.82,658.11 -215.82,877.93 -173.82,919.93 82.07,919.93 HC-?.5
RXD0: Atmega?.2 HC-?.4 | length 757.1
  Top Layer w8: Atmega?.2 -469.82,666.54 -483.82,680.54 -483.82,812.18 -427,869 -383,869 -343.07,908.93 -6.93,908.93 HC-?.4
RXD1: Atmega?.45
RXD2: Atmega?.12 RS?.2 | length 768.6
  Top Layer w8: Atmega?.12 -409.58,469.69 -405.82,465.93 -355.82,465.93 -314.82,424.93 -314.82,261.93 -470.82,105.93 -470.82,-81 -459.82,-92 RS?.2
RXD3: Atmega?.63
SCK: "NRF PH?.7" Atmega?.20 | length 2676.4
  Top Layer w8: -594.15,-289.01 -591.82,-291.34 -591.82,-308.66 -594.16,-311.01 -596.51,-313.35 -599.82,-313.35 -601.62,-313.35 ccw(c-620,-350) -589.19,-377.05 -589.04,-376.9 -586.67,-374.53 -583.36,-374.53 -580.05,-374.53 -569,-385.58 -569,-403.39 -566.66,-405.73 -564.31,-408.07 -557.82,-408.07 -515.55,-450.34 -515.55,-579.61 -392.82,-702.35 -392.82,-760.07 -365.82,-787.07 -206.41,-787.07 -58.82,-639.48 71.48,-639.48 110,-678 ; -594.18,-288.98 -596.51,-286.65 -599.82,-286.65 -601.62,-286.65 cw(c-620,-250) -601.62,-213.35 -599.82,-213.35 -596.51,-213.35 -594.16,-211.01 -591.82,-208.66 -591.82,-191.34 -594.15,-189.01 ; -594.18,-188.98 -596.51,-186.65 -599.82,-186.65 -601.62,-186.65 cw(c-620,-150) -601.62,-113.35 -599.82,-113.35 -596.51,-113.35 -594.16,-111.01 -591.82,-108.66 -591.82,-91.34 -594.15,-89.01 ; -594.18,-88.98 -596.51,-86.65 -599.82,-86.65 -601.62,-86.65 cw(c-620,-50) -601.62,-13.35 -599.82,-13.35 -596.51,-13.35 -594.16,-11.01 -591.82,-8.66 -591.82,8.66 -594.15,10.99 ; -594.18,11.02 -596.51,13.35 -599.82,13.35 -601.62,13.35 cw(c-620,50) -601.62,86.65 -599.82,86.65 -596.51,86.65 -594.16,88.99 -591.82,91.34 -591.82,108.66 -594.15,110.99 ; -594.18,111.02 -596.51,113.35 -599.82,113.35 -601.62,113.35 cw(c-620,150) -601.62,186.65 -599.82,186.65 -596.51,186.65 -594.16,188.99 -591.82,191.34 -591.82,208.66 -594.15,210.99 ; -594.18,211.02 -596.51,213.35 -599.82,213.35 -601.62,213.35 cw(c-620,250) -594.98,282.48 -592.39,282.48 -589.07,282.48 -569,302.55 -569,307.52 -564.31,312.21 Atmega?.20
SCL: Atmega?.43 R?.2@-833.16,133.13 | length 1178.6
  Top Layer w8: R?.2@-833.16,133.13 -833.16,180.51 -824,189.67 v1(-824,194) ; v1(-118,236) -114.97,232.97 -94,232.97 -40.09,179.06 -40.09,149.54 Atmega?.43
  Bottom Layer w8: v1(-824,194) -824,138.22 -829,133.22 -829,81.77 -756.23,9 -291.63,9 -118,182.63 v1(-118,236)
SDA: Atmega?.44 R?.2@186.84,-326.87 | length 1243.8
  Top Layer w8: Atmega?.44 -18.89,107.93 6.66,82.38 6.66,-95.38 -42.25,-95.38 -59.49,-112.62 -59.49,-261.8 -40.82,-280.47 -40.82,-492.53 -58.78,-510.49 -58.78,-517.11 1.18,-577.07 146.18,-577.07 186.84,-536.41 R?.2@186.84,-326.87
"TD + (OBC-COMM)": J1.13 R?.2@-865.13,-232.16 RS?.8 | length 3138.1
  Top Layer w8: R?.2@-865.13,-232.16 -865.13,-218.85 -867.82,-216.16 -870.81,-151.26 -870.82,-150.89 -870.82,196.18 v1(-825,242) ; RS?.8 -231.5,-42 -238,-35.5 -238,9.06 -213.18,33.88 -213.18,54.92 v1(-210.22,57.88)
  Bottom Layer w8: v1(-825,242) -825,277.74 -793.82,308.93 -578.82,308.93 -536.82,350.93 -155.82,350.93 52.18,142.93 J1.13@615.32,142.93 ; v1(-210.22,57.88) -142.34,-10 462.4,-10 J1.13@615.32,142.93 ; J1.13@615.32,142.93 619.61,142.93 J1.13 J1.13@615.32,142.93
"TD - (OBC-COMM)": J1.11 R?.1@-865.13,-308.41 RS?.7 | length 2314.1
  Top Layer w8: R?.1@-865.13,-308.41 -720.43,-308.41 -679,-266.98 -679,170.19 -675.18,174.02 v1(-671,203) ; v1(-299.82,46.93) -305.82,40.93 -305.82,-56 -269.82,-92 -197.5,-92 -176,-70.5 -176,-15 v1(-199,8)
  Bottom Layer w8: v1(-671,203) -455.89,203 v1(-299.82,46.93) ; v1(-199,8) -199,3.67 -185.46,-9.87 -185.46,-18.06 -178.53,-25 468.61,-25 J1.11
TXD1: Atmega?.46
TXD2: Atmega?.13 RS?.3 | length 779
  Top Layer w8: Atmega?.13 -393.89,450 -331.82,387.93 -331.82,266.14 -485.82,112.14 -485.82,-119.07 -462.89,-142 RS?.3
TXD3: Atmega?.64
VCC-3.3V(COMM): NRF.2@871.29,-99.29
VCC-5V(COMM): Atmega?.10 Atmega?.31 Atmega?.61 Atmega?.80 Atmega?.100 Bluetooth.2@871,184 C?.1@-459.79,-311.07 C?.2@336.98,212 C?.2@337.98,332 C?.2@495.98,334 C?.2@498.98,212 J1.10 R?.1@110.59,-326.87 R?.1@273.59,458.13 R?.1@-104.41,-53.87 R?.1@-909.41,133.13 RS?.1 | length 1591.5
  Top Layer w8: R?.1@-909.41,133.13 -909.41,190.26 -901,198.67 -901,230.22 v1(-899.61,231.61) ; v1(-483,-249) -459.79,-272.21 C?.1@-459.79,-311.07 ; Atmega?.10 -437.46,510.57 -404.36,510.57 -379.93,535 v1(-247,535) ; RS?.1 -420,33 v1(-399,54) ; v1(-413,825) -409.94,821.94 -409.94,812.11 -373.22,775.39 Atmega?.100 ; v1(-307,222) -276.31,191.31 -276.31,149.54 Atmega?.31 ; v1(-116,-111.07) -116,-107.97 -104.41,-96.38 R?.1@-104.41,-53.87 ; Atmega?.80 20.48,669.52 v1(46,644) ; v1(32,367) 75.63,410.63 Atmega?.61 ; v1(78.59,-374.38) 98.18,-374.38 110.59,-361.97 R?.1@110.59,-326.87 ; v1(231,391) 234.06,394.06 234.06,411.91 273.59,451.44 R?.1@273.59,458.13 ; C?.2@336.98,212 336.98,172.83 341.66,168.15 357.78,168.15 371.86,154.07 371.86,137.07 v1(389,119.93) ; C?.2@337.98,332 337.98,326.49 380.94,283.53 380.94,274.06 v1(384,271) ; v1(486,465) 486,460.67 495.98,450.69 C?.2@495.98,334 ; C?.2@498.98,212 498.98,124.35 509,114.33 v1(509,110)
XTAL1: Atmega?.34 C?.2@0.02,-314.94 R?.1@-273.41,-298.87 Y?.2 | length 1903
  Top Layer w8: v1(-328,-313) -293.23,-313 -279.82,-299.59 R?.1@-279.82,-298.87 ; R?.1@-273.41,-298.87 R?.1@-279.82,-298.87 ; Atmega?.34 -215.74,95.93 -139.23,19.42 -139.23,-113.05 -175.82,-164.07 -265.82,-164.07 -279.82,-178.07 R?.1@-279.82,-298.87 ; v1(0,-378) 0,-362.46 C?.2@0,-314.97 ; 0.02,-362.46 20.43,-342.05 58,-304.48 58,-134.53 51,-127.53 51,-25.57 58,-18.57 58,-0.26 91.18,32.93 358.43,32.93 Y?.2
  Bottom Layer w8: v1(-328,-313) -308.07,-293.07 -69.36,-293.07 -36.21,-326.22 -36.21,-341.79 v1(0,-378)
XTAL2: Atmega?.33 C?.2@178.02,-175.94 R?.2@-19.98,-175.94 Y?.1 | length 1794.3
  Top Layer w8: Atmega?.33 -235.42,279.5 -213,301.93 82.18,301.93 116.18,267.93 116.18,109.93 22.18,15.93 22.18,-110 -3.05,-135.23 -19.98,-135.23 -19.98,-182.64 34.54,-237.15 v1(35,-237.15) ; C?.2@178.02,-175.94 178.02,-223.46 ; v1(209,-248) 209,-243.67 197.14,-231.81 197.14,-228.14 192.46,-223.46 178.02,-223.46 ; Y?.1 358.43,-310.32 324.11,-276 209,-276 178.02,-245.02 178.02,-223.46
  Bottom Layer w8: v1(35,-237.15) 63.63,-237.15 100.71,-200.07 195.07,-200.07 215,-220 215,-228 212.06,-230.94 212.06,-244.94 v1(209,-248)
pads on no net: "NRF PH?.4" Atmega?.4 Atmega?.8 Atmega?.9 Atmega?.14 Atmega?.15 Atmega?.16 Atmega?.17 Atmega?.23 Atmega?.24 Atmega?.25 Atmega?.26 Atmega?.27 Atmega?.28 Atmega?.29 Atmega?.35 Atmega?.36 Atmega?.37 Atmega?.38 Atmega?.39 Atmega?.40 Atmega?.41 Atmega?.42 Atmega?.47 Atmega?.48 Atmega?.49 Atmega?.50 Atmega?.51 Atmega?.52 Atmega?.53 Atmega?.54 Atmega?.55 Atmega?.56 Atmega?.57 Atmega?.58 Atmega?.59 Atmega?.60 Atmega?.65 Atmega?.66 Atmega?.67 Atmega?.68 Atmega?.69 Atmega?.70 Atmega?.71 Atmega?.72 Atmega?.73 Atmega?.74 Atmega?.75 Atmega?.76 Atmega?.77 Atmega?.78 Atmega?.79 Atmega?.82 Atmega?.83 Atmega?.84 Atmega?.85 Atmega?.86 Atmega?.87 Atmega?.88 Atmega?.89 Atmega?.90 Atmega?.91 Atmega?.92 Atmega?.93 Atmega?.94 HC-?.1 HC-?.6 J1.1 J1.3 J1.5 J1.7 J1.9 J1.14 J1.16 J1.18 J1.19 J1.20 J2.1 J2.3 J2.5 J2.6 J2.7 J2.8 J2.9 J2.10 J2.11 J2.12 J2.13 J2.14 J2.15 J2.16 J2.17 J2.18 J2.19 J2.20

## Polygon pours and split planes (outlines as drawn)
G on Ground (split plane): 233 vertices, not listed, extent -964.26,-964.23 964.2,964.24
VCC-5V(COMM) on Power (split plane): 233 vertices, not listed, extent -964.26,-964.23 964.2,964.24

## Silkscreen, mask and mechanical layers (free items; w line width, h text height)
Mechanical 1:
  circle w10: c-0.03,0 r984.25